# EAGLE board V-00237-011 (EAGLE 7.2.0)
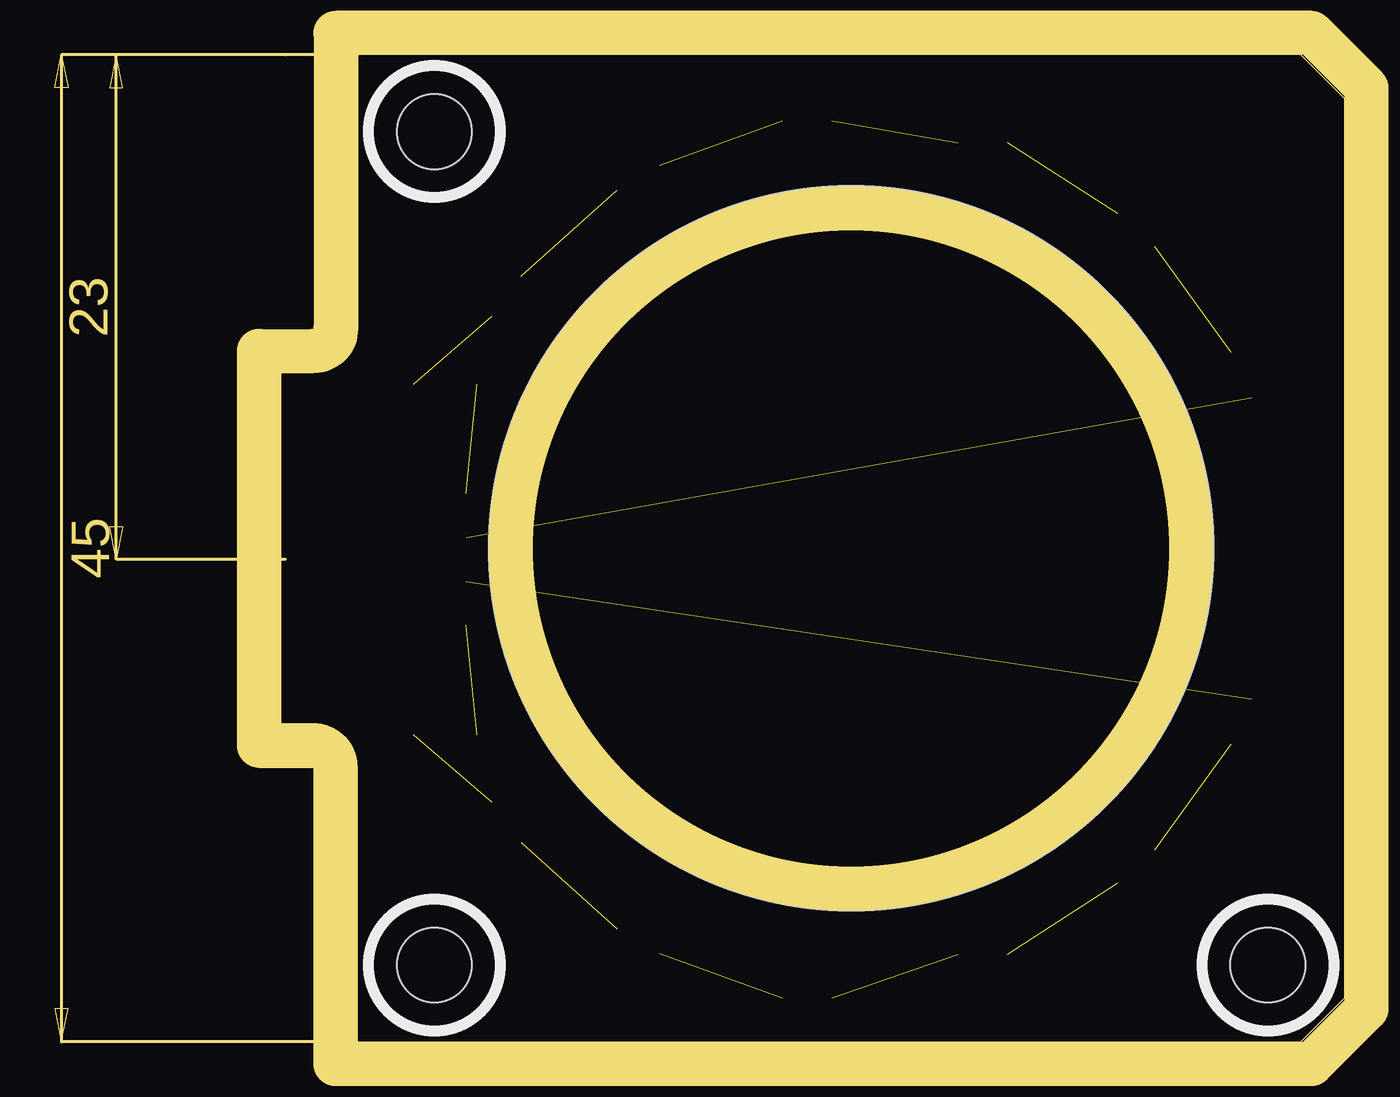
[diagram p0: board, top side]
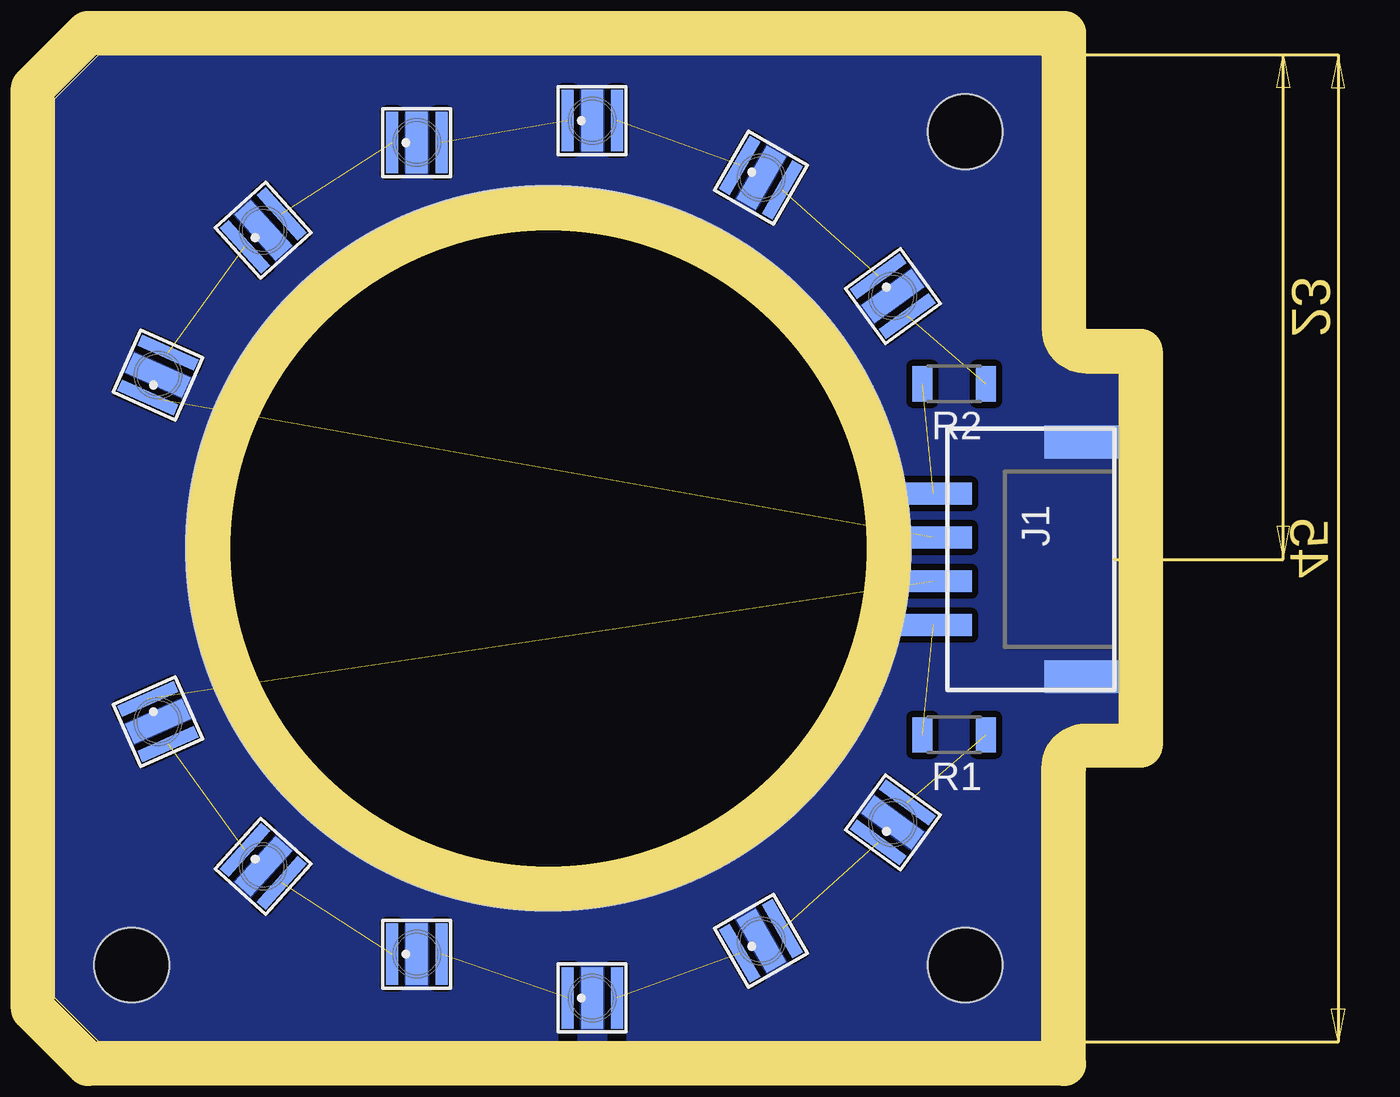
[diagram p1: board, bottom side, seen from below]

Size 48.5 x 45 mm. Coordinates in mm from the lower left corner, seen from the top.
Outline: 3.5,0 46.5,0 48.5,2 48.5,43 46.5,45 3.5,45 3.5,32.5 arc-90 1.5,30.5 0,30.5 0,14.5 1.5,14.5 arc-90 3.5,12.5 3.5,0
Copper layers (1*16): Top 0.04mm / dielectric 1.5mm / Bottom 0.04mm
Design rules "Michal_small *": minimum track width 0.2mm, minimum drill 0.3mm, track to track 0.3mm, track to pad 0.3mm, pad to pad 0.2mm, via to via 0.2mm, smd to smd 0mil, copper to edge 0.001mm, drill to drill 0.2mm, minimum pad ring 0.3mm, minimum via ring 0.3mm, stop-mask expansion 4mil, vias tented up to drill 0.5mm, thermal gap 0.2mm
Holes 3.4 mm at 45,3.5 7,41.5 7,3.5
Holes 33 mm at 26,22.5
Milling: area 10.5,7 to 41.5,38; 12 lines

## Footprints (pad centres in the part's own frame; a part is rotated, then mirrored left to right if it is on the bottom)
OSRAM_LCW = smd 0.55 x 2.8: A -1.125,0; C 1.125,0 | smd 1 x 2.8: THERMAL 0,0
S4B-PH-SM4-TB = smd 1 x 3.5: 1 3,-8.25; 2 1,-8.25; 3 -1,-8.25; 4 -3,-8.25 | smd 1.5 x 3.4: GND1 -5.35,-1.5; GND2 5.35,-1.5
R1206 = smd 0.9 x 1.6: 1 -1.45,0; 2 1.45,0

## Placement (x,y rotation side)
D1  OSRAM_LCW_CQ7P.EC-KTLP-5J7K-1-K  [OSRAM_LCW]  10.3,34 126 bottom
D2  OSRAM_LCW_CQ7P.EC-KTLP-5J7K-1-K  [OSRAM_LCW]  16.3,39.4 150 bottom
D3  OSRAM_LCW_CQ7P.EC-KTLP-5J7K-1-K  [OSRAM_LCW]  24,42 180 bottom
D4  OSRAM_LCW_CQ7P.EC-KTLP-5J7K-1-K  [OSRAM_LCW]  32,41 180 bottom
D5  OSRAM_LCW_CQ7P.EC-KTLP-5J7K-1-K  [OSRAM_LCW]  39,37 222 bottom
D6  OSRAM_LCW_CQ7P.EC-KTLP-5J7K-1-K  [OSRAM_LCW]  43.8,30.4 246 bottom
D8  OSRAM_LCW_CQ7P.EC-KTLP-5J7K-1-K  [OSRAM_LCW]  10.3,10 234 bottom
D9  OSRAM_LCW_CQ7P.EC-KTLP-5J7K-1-K  [OSRAM_LCW]  16.3,4.6 210 bottom
D10  OSRAM_LCW_CQ7P.EC-KTLP-5J7K-1-K  [OSRAM_LCW]  24,2 180 bottom
D11  OSRAM_LCW_CQ7P.EC-KTLP-5J7K-1-K  [OSRAM_LCW]  32,4 180 bottom
D12  OSRAM_LCW_CQ7P.EC-KTLP-5J7K-1-K  [OSRAM_LCW]  39,8 138 bottom
D13  OSRAM_LCW_CQ7P.EC-KTLP-5J7K-1-K  [OSRAM_LCW]  43.8,14.6 114 bottom
J1  S4B-PH-SM4-TB  [S4B-PH-SM4-TB]  0.2,22 270 bottom
R1  [R1206]  7.5,14 180 bottom
R2  [R1206]  7.5,30 180 bottom

## Library data of the parts
D1-D6 D8-D13 = led
J1 = con-jst
R1 R2 = rcl

## Nets
1+: J1.4 R2.2
1-: D6.C J1.3
2+: J1.1 R1.2
2-: D13.C J1.2
N$1: D1.C D2.A
N$2: D2.C D3.A
N$3: D3.C D4.A
N$4: D4.C D5.A
N$5: D5.C D6.A
N$6: D1.A R2.1
N$7: D8.C D9.A
N$8: D9.C D10.A
N$9: D10.C D11.A
N$10: D11.C D12.A
N$11: D8.A R1.1
N$14: D12.C D13.A
THERMAL: D1.THERMAL D2.THERMAL D3.THERMAL D4.THERMAL D5.THERMAL D6.THERMAL D8.THERMAL D9.THERMAL D10.THERMAL D11.THERMAL D12.THERMAL D13.THERMAL J1.GND1 J1.GND2

## Tracks (layer width: path | path; a pad name or v marks a point on that pad's centre or on a via)
1+  (1 unrouted)
1-  (1 unrouted)
2+  (1 unrouted)
2-  (1 unrouted)
N$1  (1 unrouted)
N$2  (1 unrouted)
N$3  (1 unrouted)
N$4  (1 unrouted)
N$5  (1 unrouted)
N$6  (1 unrouted)
N$7  (1 unrouted)
N$8  (1 unrouted)
N$9  (1 unrouted)
N$10  (1 unrouted)
N$11  (1 unrouted)
N$14  (1 unrouted)
THERMAL
  pour Bottom (rank 3, no thermals): 0,0 49.5,0 49.5,45.5 0,45.5